# EAGLE board ardiuno shield (EAGLE 6.1)
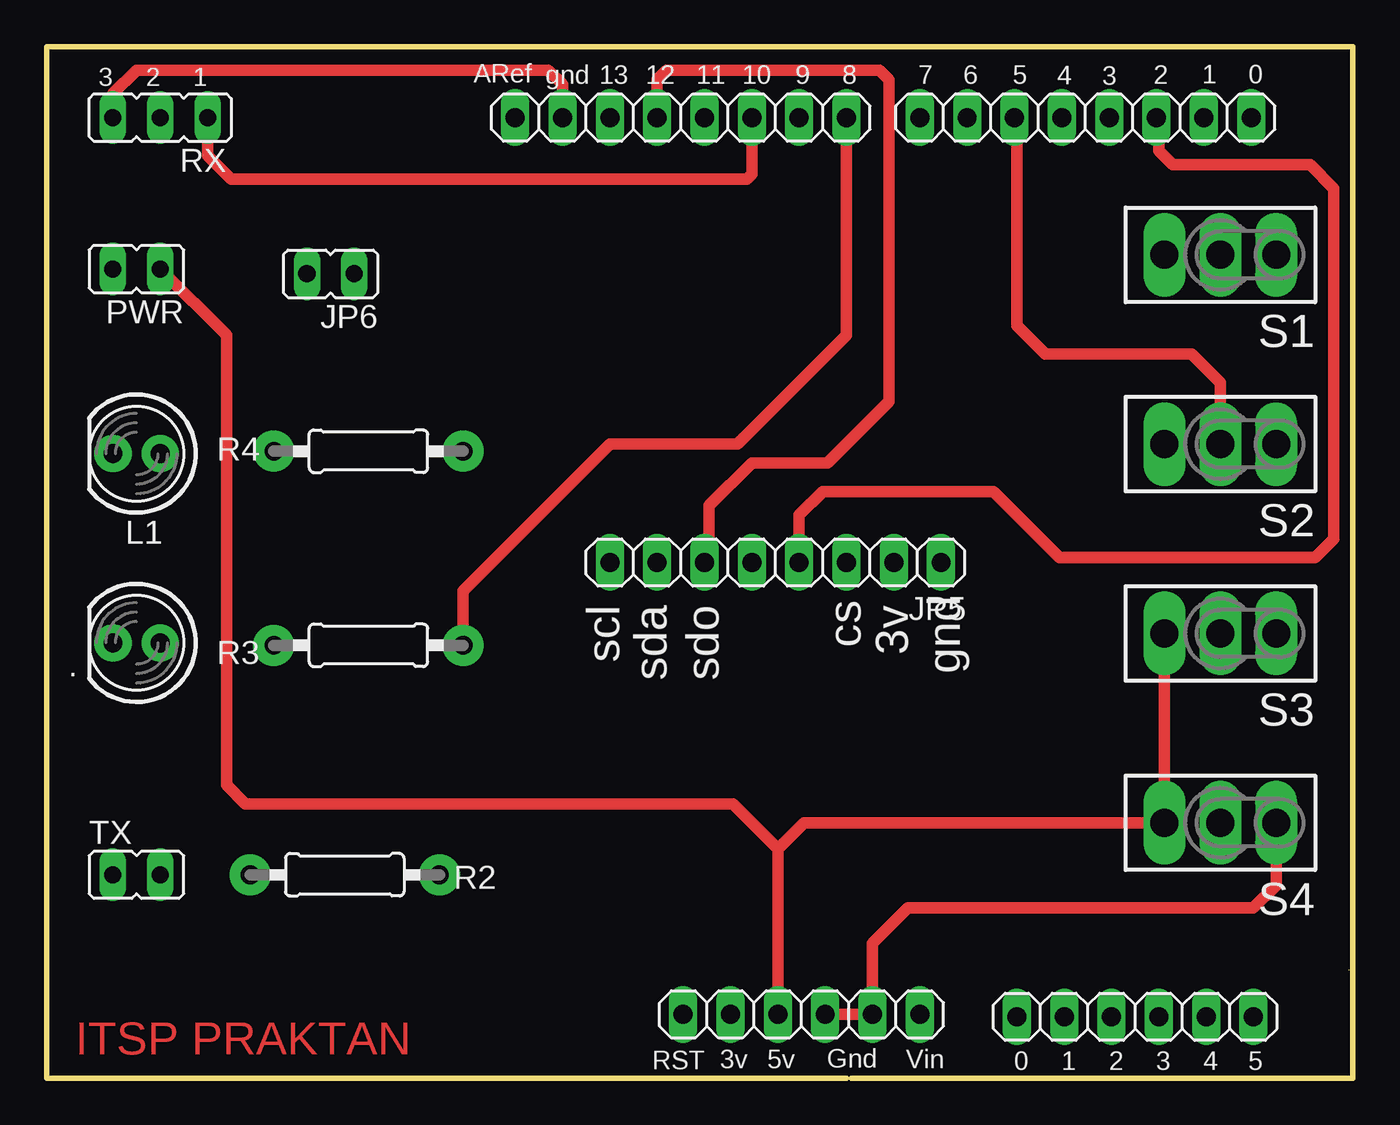
[diagram p0: board, top side]
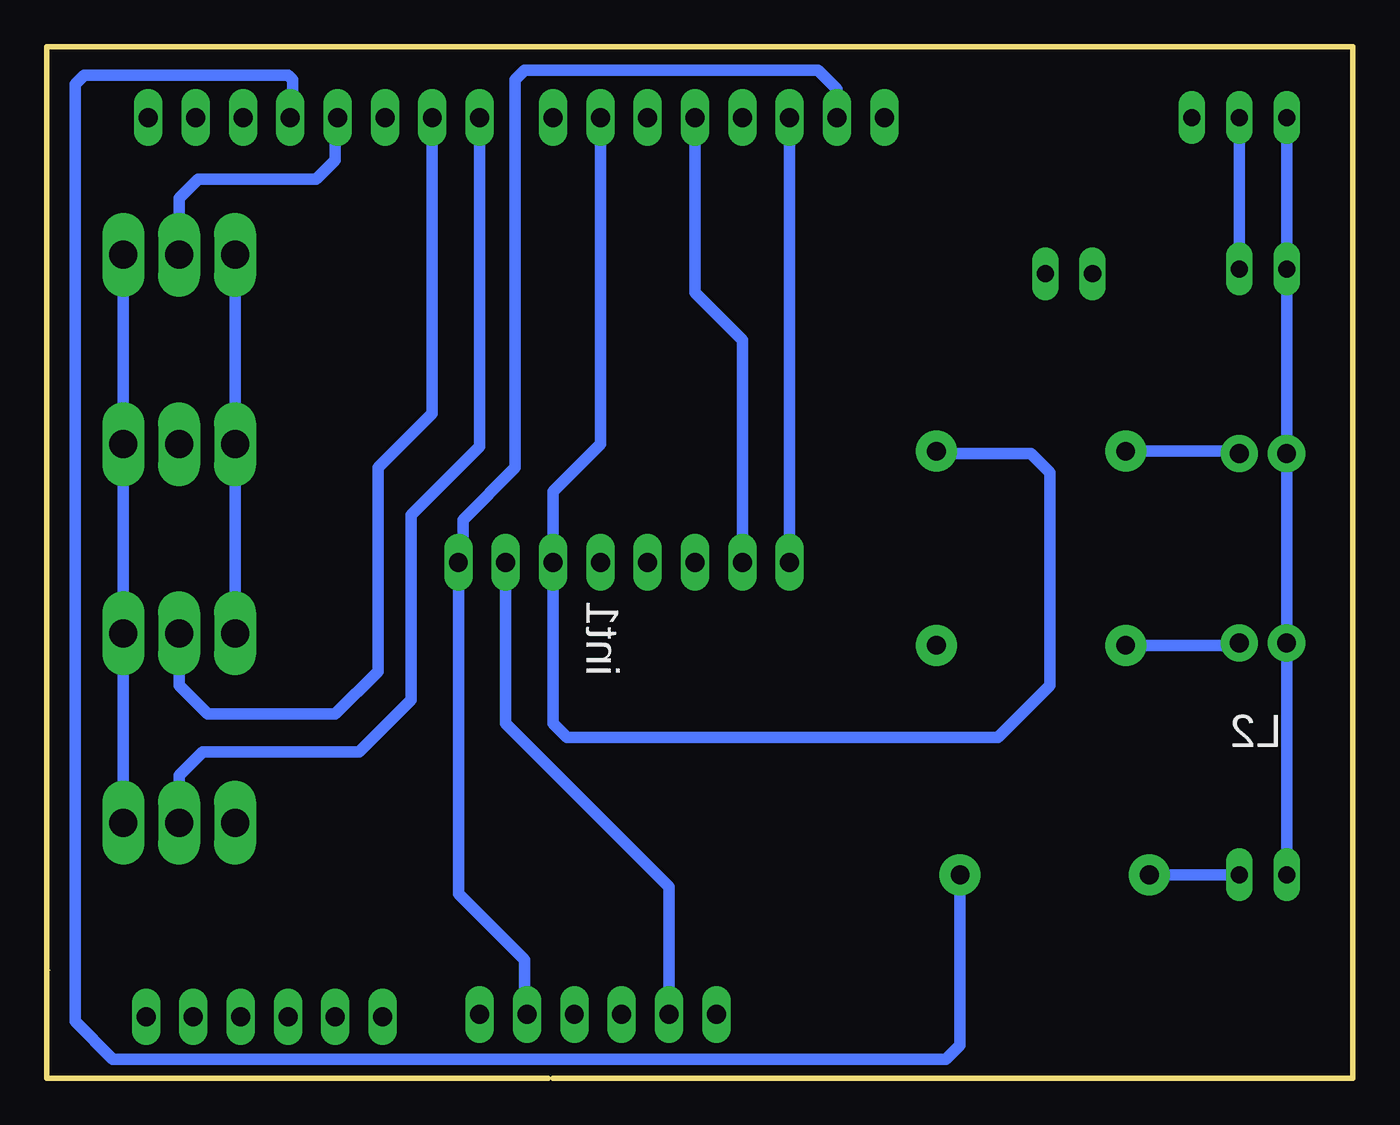
[diagram p1: board, bottom side, seen from below]

Size 70.1 x 55.37 mm. Coordinates in mm from the lower left corner, seen from the top.
Outline: 69.9,5.8 69.9,5.81
Outline: 43.18,0 70.1,0 70.1,55.37 0,55.37 0,0 42.93,0
Copper layers (1*16): Top 0.035mm / dielectric 1.5mm / Bottom 0.035mm
Design rules: minimum track width 6mil, minimum drill 12mil, track to track 6mil, track to pad 6mil, pad to pad 6mil, via to via 6mil, smd to smd 0mil, copper to edge 10mil, drill to drill 10mil, minimum pad ring 10mil, minimum via ring 6mil, stop-mask expansion 2mil, vias tented up to drill 100mil, thermal gap 10mil

## Footprints (pad centres in the part's own frame; a part is rotated, then mirrored left to right if it is on the bottom)
LED5MM = drill 1 pad 2: A -1.27,0; K 1.27,0
1X08 = drill 1.016 long: 1 -8.89,0; 2 -6.35,0; 3 -3.81,0; 4 -1.27,0; 5 1.27,0; 6 3.81,0; 7 6.35,0; 8 8.89,0
1X06 = drill 1.016 long: 1 -6.35,0; 2 -3.81,0; 3 -1.27,0; 4 1.27,0; 5 3.81,0; 6 6.35,0
JP1 = drill 0.914 long: 1 0,-1.27; 2 0,1.27
0207/10 = drill 1 pad 2.2: 1 -5.08,0; 2 5.08,0
JP2 = drill 0.914 long: 1 -2.54,0; 2 0,0; 3 2.54,0
TL3XPO = drill 1.5 pad 1.8 long: 1 -3,0; 2 0,0; 3 3,0

## Placement (x,y rotation side)
.  [LED5MM]  4.83,23.37 180 top
JP1  [1X08]  34.04,51.56 180 top
JP2  [1X08]  55.75,51.56 180 top
JP3  [1X06]  40.51,3.43 180 top
JP4  [1X06]  58.42,3.3 180 top
JP5  [1X08]  39.12,27.69 180 top
JP6  [JP1]  15.24,43.18 90 top
L1  [LED5MM]  4.83,33.53 180 top
PWR  [JP1]  4.83,43.43 90 top
R2  [0207/10]  16,10.92 180 top
R3  [0207/10]  17.27,23.24 0 top
R4  [0207/10]  17.27,33.66 0 top
RX  [JP2]  6.1,51.56 180 top
S1  s1  [TL3XPO]  62.99,44.2 180 top
S2  s2  [TL3XPO]  62.99,34.04 180 top
S3  s3  [TL3XPO]  62.99,23.88 180 top
S4  s4  [TL3XPO]  62.99,13.72 180 top
TX  [JP1]  4.83,10.92 270 top

## Library data of the parts
. L1 = led
JP1-JP5 = pinhead
JP6 PWR RX TX = jumper
R2-R4 = rcl
S1-S4 = switch

## Nets
3: JP2.4 R2.1
8: JP1.1 R3.2
10: JP1.3 RX.1
+3V3: JP3.5 JP5.2
+5V: JP3.4 PWR.1 RX.2 S1.3 S2.3 S3.3 S4.3
CS: JP1.2 JP5.3 R4.2
GND: ..K JP1.7 JP3.2 JP3.3 JP5.1 L1.K PWR.2 RX.3 S1.1 S2.1 S3.1 S4.1 TX.1
INT1: JP2.3 JP5.4
INT2: JP5.5
N$1: L1.A R4.1
N$2: ..A R3.1
N$5: JP1.8
N$13: R2.2 TX.2
SCL: JP1.6 JP5.8
SDA: JP1.4 JP5.7
SDO: JP1.5 JP5.6
SW1: JP2.5 S1.2
SW2: JP2.6 S2.2
SW3: JP2.7 S3.2
SW4: JP2.8 S4.2

## Tracks (layer width: path | path; a pad name or v marks a point on that pad's centre or on a via)
3
  Bottom 0.254: JP2.4 56.9,51.69
  Bottom 0.61: 56.9,51.69 56.9,53.59 57.15,53.85 68.07,53.85 68.58,53.34 68.58,3.05 66.55,1.02 21.84,1.02 21.08,1.78 R2.1
8
  Top 0.61: JP1.1 42.93,39.88 37.08,34.04 30.23,34.04 22.35,26.16 R3.2
10
  Top 0.61: RX.1 8.64,49.53 9.91,48.26 37.59,48.26 37.85,48.51 JP1.3
+3V3
  Bottom 0.61: JP5.2 45.47,19.05 36.7,10.29 JP3.5
+5V
  Top 0.61: PWR.1 9.65,39.88 9.65,15.75 10.67,14.73 36.83,14.73 39.24,12.32 | 39.24,2.41 JP3.4 39.24,12.32 | S3.3 S4.3 40.64,13.72 39.24,12.32
  Bottom 0.61: RX.2 PWR.1 | S1.3 S2.3 S3.3
CS
  Bottom 0.406: 22.23,33.53 R4.2
  Bottom 0.61: 22.23,33.53 17.27,33.53 16.26,32.51 16.26,29.34 16.26,21.08 19.05,18.29 42.16,18.29 42.93,19.05 JP5.3 42.93,31.5 40.39,34.04 JP1.2
GND
  Top 0.61: JP1.7 27.69,53.34 26.92,54.1 4.83,54.1 3.56,52.83 RX.3 | JP3.3 JP3.2 44.32,7.24 46.23,9.14 64.77,9.14 65.99,10.37 S4.1
  Bottom 0.61: RX.3 PWR.2 L1.K ..K TX.1 | S4.1 S3.1 S2.1 S1.1 | JP1.7 27.69,53.09 28.7,54.1 44.45,54.1 44.96,53.59 44.96,32.77 47.75,29.97 47.75,27.94 JP5.1 48.01,9.91 44.45,6.35 44.45,3.56 JP3.2
INT1
  Top 0.254: JP2.3 59.69,51.44
  Top 0.61: 59.69,51.44 59.69,49.78 60.45,49.02 67.82,49.02 69.09,47.75 69.09,28.96 68.07,27.94 54.36,27.94 50.8,31.5 41.66,31.5 40.39,30.23 JP5.4
N$1
  Bottom 0.406: 6.22,33.66 L1.A
  Bottom 0.61: R4.1 6.22,33.66
N$2
  Bottom 0.254: ..A 6.22,23.24
  Bottom 0.61: 6.22,23.24 R3.1
N$13
  Bottom 0.61: TX.2 R2.2
SCL
  Bottom 0.61: JP1.6 JP5.8
SDA
  Bottom 0.61: JP1.4 35.31,42.16 32.77,39.62 JP5.7
SDO
  Top 0.61: JP1.5 32.77,53.59 33.27,54.1 44.7,54.1 45.21,53.59 45.21,36.32 41.91,33.02 37.85,33.02 35.56,30.73 35.56,27.94 JP5.6
SW1
  Bottom 0.254: JP2.5 54.61,51.44
  Bottom 0.61: 54.61,51.44 54.61,49.28 55.63,48.26 61.98,48.26 62.99,47.24 S1.2
SW2
  Top 0.254: JP2.6 52.07,51.44
  Top 0.61: 52.07,51.44 52.07,40.39 53.59,38.86 61.47,38.86 62.99,37.34 S2.2
SW3
  Bottom 0.61: JP2.7 49.4,35.69 52.32,32.77 52.32,21.84 54.61,19.56 61.47,19.56 62.99,21.08 S3.2
SW4
  Bottom 0.61: JP2.8 46.86,33.91 50.55,30.23 50.55,20.32 53.34,17.53 61.72,17.53 62.99,16.26 S4.2

## Text on the board
Top: ITSP PRAKTAN
tPlace: ARef | gnd | 13 | 12 | 11 | 10 | 9 | 8 | 7 | 6 | 5 | 4 | 3 | 2 | 1 | 0 | 3v | 5v | Gnd | Vin | RST | 0 | 1 | 2 | 3 | 4 | 5
tNames: cs | gnd | scl | sda | sdo | 3v
bNames: int1 | L2
Reference: 2.65" | 2.16" | 2.75"